# EAGLE board spi_tiny_usb (EAGLE 6.1)
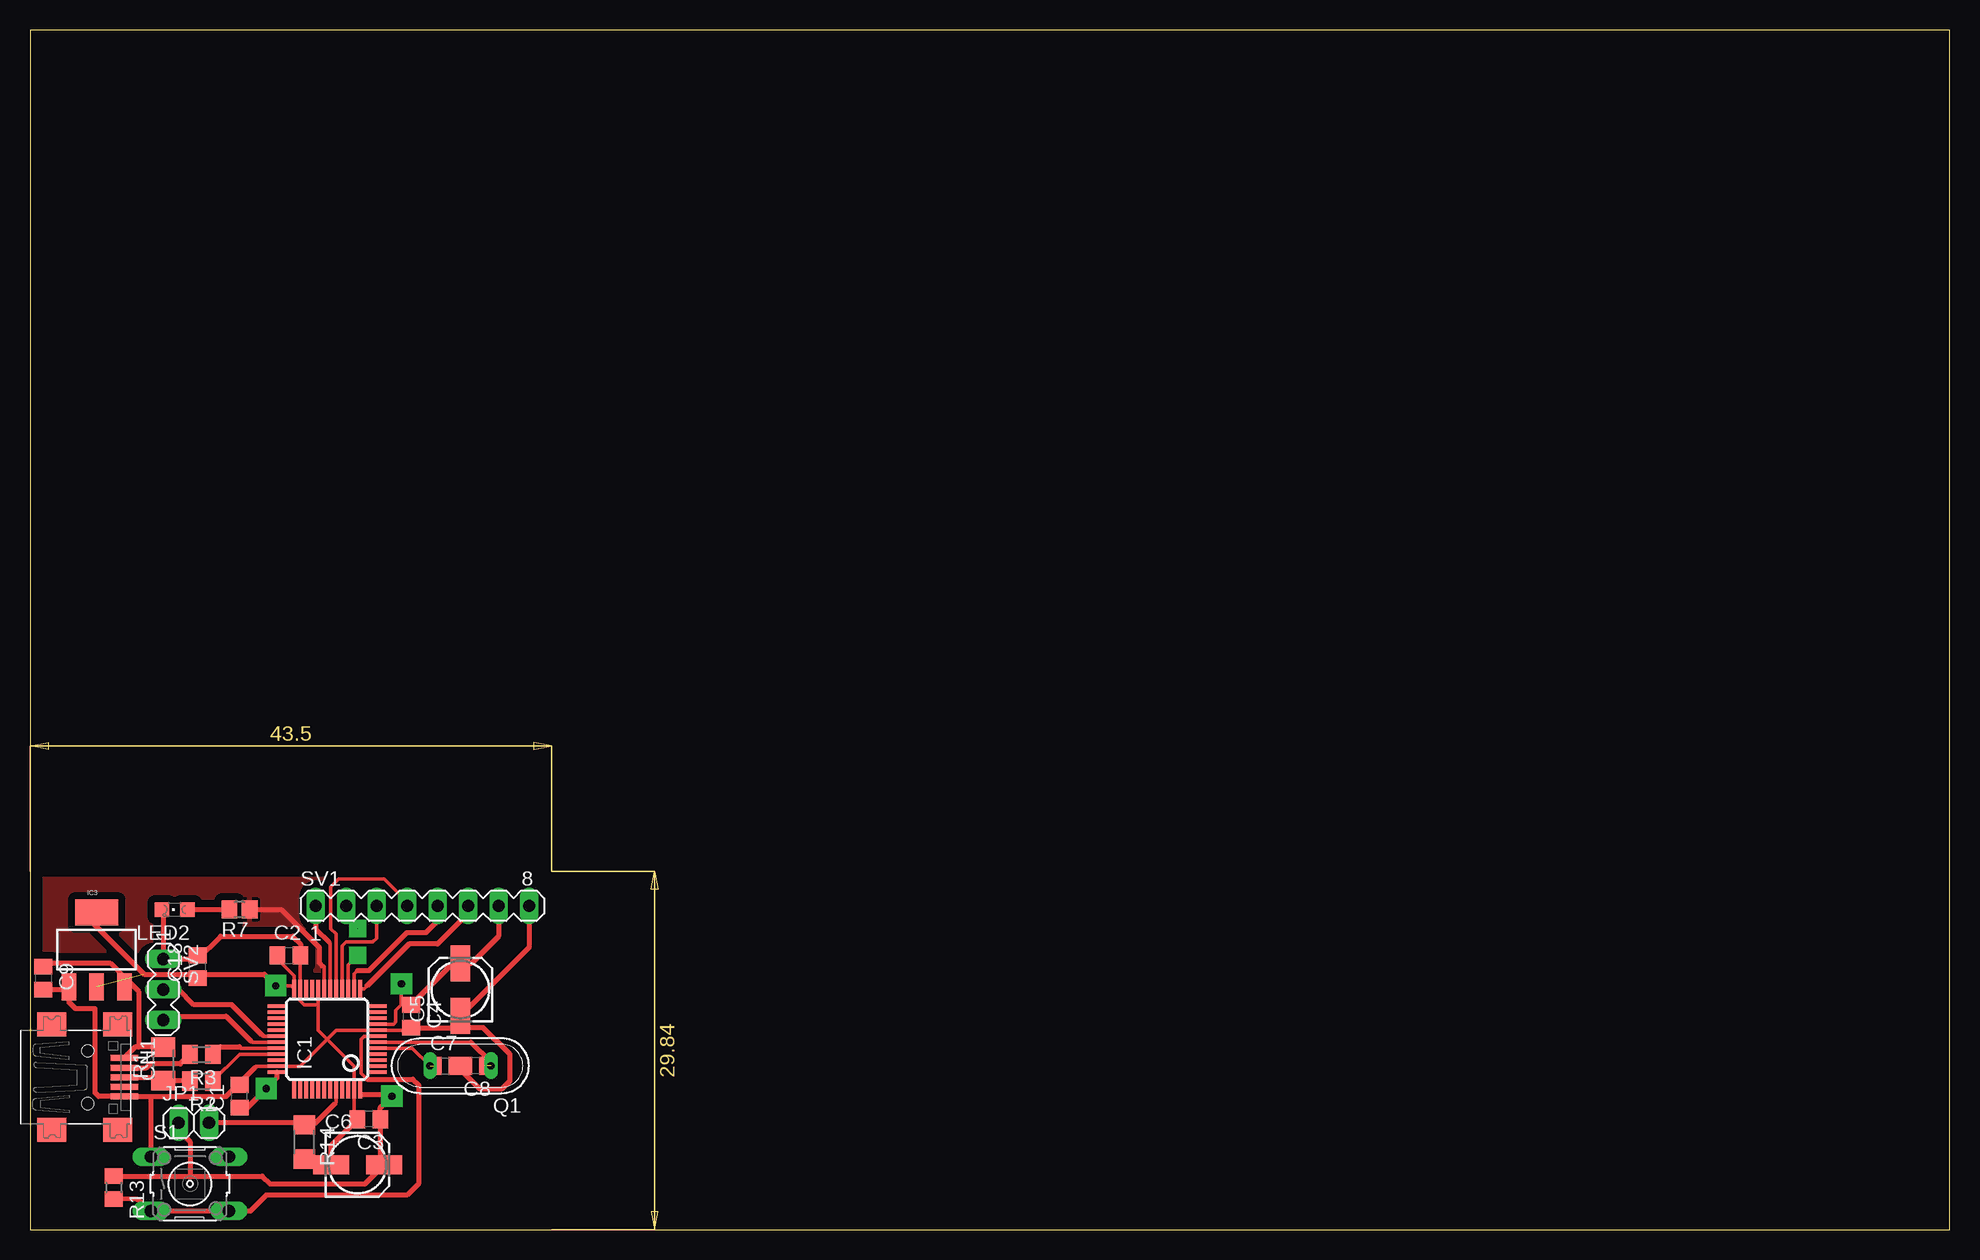
[diagram p0: board, top side]
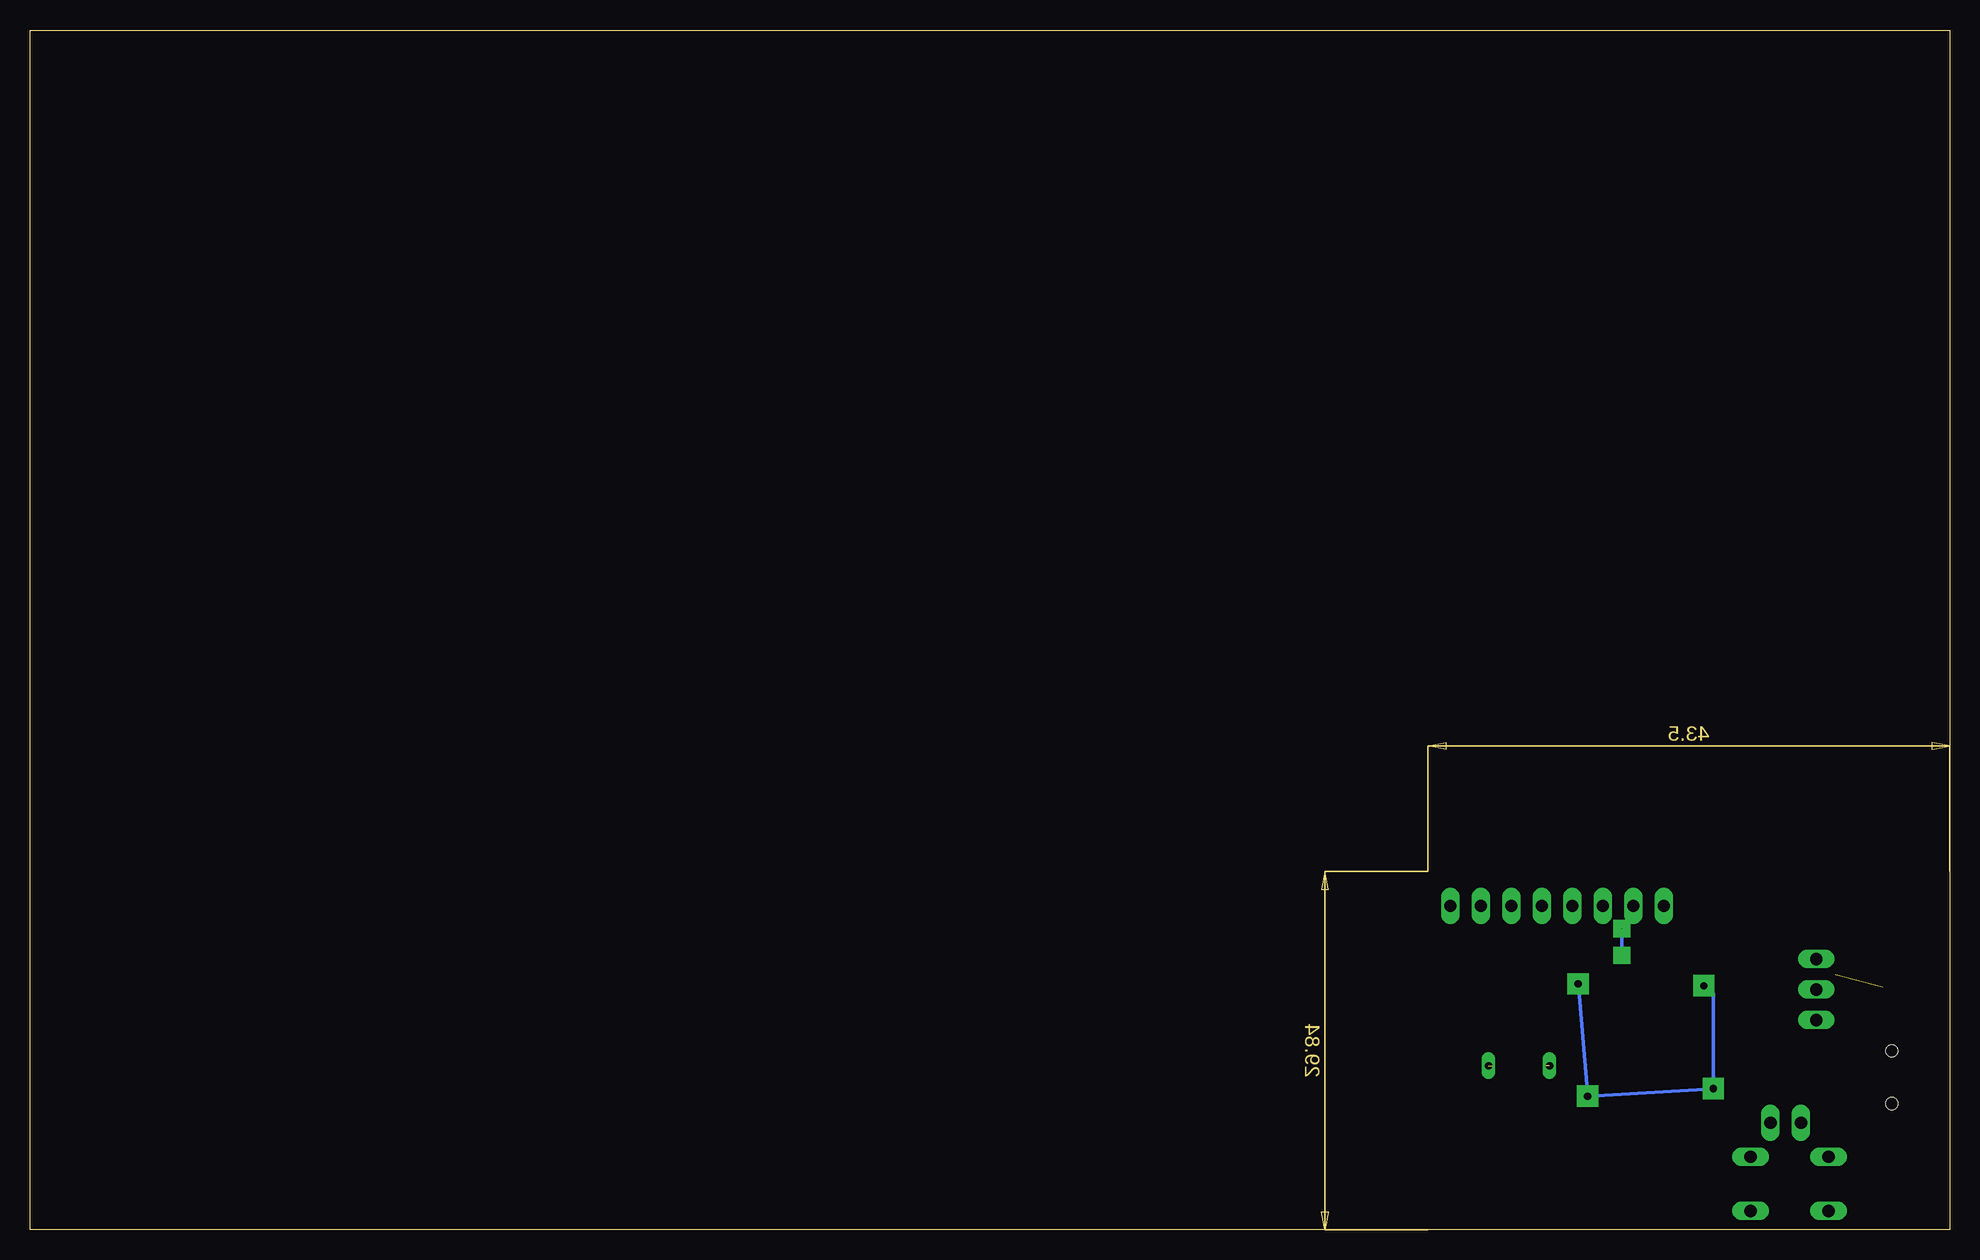
[diagram p1: board, bottom side, seen from below]

Size 160 x 100 mm. Coordinates in mm from the lower left corner, seen from the top.
Outline: 0,0 160,0 160,100 0,100 0,0
Copper layers (1*16): Top 0.035mm / dielectric 1.5mm / Bottom 0.035mm
Design rules: minimum track width 10mil, minimum drill 24mil, track to track 8mil, track to pad 8mil, pad to pad 8mil, via to via 8mil, smd to smd 8mil, copper to edge 40mil, drill to drill 8mil, minimum pad ring 10mil, minimum via ring 8mil, stop-mask expansion 4mil, vias tented up to drill 0mil, thermal gap 10mil

## Footprints (pad centres in the part's own frame; a part is rotated, then mirrored left to right if it is on the bottom)
C0805 = smd 1.3 x 1.5: 1 -0.95,0; 2 0.95,0
153CLV-0505 = smd 3 x 1.6: + 2.2,0; - -2.2,0
USB-MINIB = smd 0.5 x 2.308: D+ 0,4.064; D- -0.8,4.064; GND 1.6,4.064; ID 0.8,4.064; VBUS -1.6,4.064 | smd 2 x 2.4: GND1 -4.4,-2; GND2 -4.4,3.5; GND3 4.4,3.5; GND4 4.4,-2 | hole 1: -2.2,1; 2.2,1
TQFP48 = smd 0.305 x 1.524: 1 -2.75,-4.183; 2 -2.25,-4.183; 3 -1.75,-4.183; 4 -1.25,-4.183; 5 -0.75,-4.183; 6 -0.25,-4.183; 7 0.25,-4.183; 8 0.75,-4.183; 9 1.25,-4.183; 10 1.75,-4.183; 11 2.25,-4.183; 12 2.75,-4.183; 25 2.75,4.183; 26 2.25,4.183; 27 1.75,4.183; 28 1.25,4.183; 29 0.75,4.183; 30 0.25,4.183; 31 -0.25,4.183; 32 -0.75,4.183; 33 -1.25,4.183; 34 -1.75,4.183; 35 -2.25,4.183; 36 -2.75,4.183 | smd 1.524 x 0.305: 13 4.183,-2.75; 14 4.183,-2.25; 15 4.183,-1.75; 16 4.183,-1.25; 17 4.183,-0.75; 18 4.183,-0.25; 19 4.183,0.25; 20 4.183,0.75; 21 4.183,1.25; 22 4.183,1.75; 23 4.183,2.25; 24 4.183,2.75; 37 -4.183,2.75; 38 -4.183,2.25; 39 -4.183,1.75; 40 -4.183,1.25; 41 -4.183,0.75; 42 -4.183,0.25; 43 -4.183,-0.25; 44 -4.183,-0.75; 45 -4.183,-1.25; 46 -4.183,-1.75; 47 -4.183,-2.25; 48 -4.183,-2.75
SOT223 = smd 1.219 x 2.235: 1 -2.311,-3.099; 2 0,-3.099; 3 2.311,-3.099 | smd 3.6 x 2.2: 4 0,3.099
1X02 = drill 1.016 long: 1 -1.27,0; 2 1.27,0
CHIPLED_0805 = smd 1.2 x 1.2: A 0,-1.05; C 0,1.05
QS = drill 0.61 long: 1 -2.54,0; 2 2.54,0
M1206 = smd 1.6 x 2: 1 -1.4,0; 2 1.4,0
M0805 = smd 1.3 x 1.6: 1 -0.95,0; 2 0.95,0
R0805 = smd 1.3 x 1.5: 1 -0.85,0; 2 0.85,0
R0805' = smd 1.3 x 1.5: 1 -0.95,0; 2 0.95,0
R1206 = smd 1.6 x 1.803: 1 -1.422,0; 2 1.422,0
B3F-10XX = drill 1.016 long: 1 -3.251,2.261; 2 3.251,2.261; 3 -3.251,-2.261; 4 3.251,-2.261
MA08-1 = drill 1.016 long: 1 -8.89,0; 2 -6.35,0; 3 -3.81,0; 4 -1.27,0; 5 1.27,0; 6 3.81,0; 7 6.35,0; 8 8.89,0
MA03-1 = drill 1.016 long: 1 -2.54,0; 2 0,0; 3 2.54,0

## Placement (x,y rotation side)
C1  100n  [C0805]  17.46,11.11 90 top
C2  100n  [C0805]  21.59,22.86 0 top
C3  100n  [C0805]  28.26,9.21 180 top
C4  10n  [C0805]  31.75,17.78 270 top
C5  1u  [153CLV-0505]  35.88,20 90 top
C6  4.7u  [153CLV-0505]  27.3,5.4 0 top
C7  22p  [C0805]  34.61,13.65 0 top
C8  22p  [C0805]  37.15,13.65 180 top
C9  100n  [C0805]  1.11,20.95 270 top
C18  100n  [C0805]  13.97,21.91 90 top
CN1  [USB-MINIB]  3.81,12.7 270 top
IC1  STM32F10XCXT6  [TQFP48]  24.77,15.88 90 top
IC3  [SOT223]  5.56,23.34 0 top
JP1  [1X02]  13.65,8.89 0 top
LED2  GREEN  [CHIPLED_0805]  12.06,26.67 90 top
Q1  [QS]  35.88,13.65 180 top
R1  1k5  [M1206]  11.11,13.81 90 top
R2  68  [M0805]  14.29,12.38 180 top
R3  68  [M0805]  14.29,14.61 180 top
R7  250  [R0805]  17.46,26.67 180 top
R13  4k7  [R0805']  6.99,3.49 270 top
R14  4k7  [R1206]  22.86,7.3 270 top
S1  [B3F-10XX]  13.34,3.81 0 top
SV1  [MA08-1]  32.7,26.99 0 top
SV2  [MA03-1]  11.11,20 270 top

## Library data of the parts
C1-C9 C18 R1-R3 R13 R14 = rcl-kd
CN1 = adafruit
IC1 = stm32
IC3 = SparkFun
JP1 = pinhead-kd
LED2 = led
Q1 = special
R7 = resistor
S1 = switch-omron; MPN: B3F-1000; OC_FARNELL: 176432; OC_NEWARK: 36M3542
SV1 SV2 = con-lstb; OC_FARNELL: unknown; OC_NEWARK: unknown

## Nets
BUZZER: IC1.2
CE: IC1.14 SV1.5
D+: IC1.33 R2.1
D-: IC1.32 R3.1
EXT1: IC1.3
EXT2: IC1.4
GND: C1.2 C2.2 C3.2 C4.2 C5.- C6.- C7.2 C8.2 C9.2 C18.2 CN1.GND IC1.8 IC1.20 IC1.23 IC1.35 IC1.47 IC3.1 LED2.C R14.2 S1.1 SV1.8 SV2.1
GP: IC1.13 SV1.6
IRQ: IC1.18 SV1.1
LED: IC1.19 R7.1
MISO: IC1.16 SV1.3
MOSI: IC1.17 SV1.4
N$1: C7.1 IC1.5 Q1.2
N$2: C8.1 IC1.6 Q1.1
N$3: CN1.D+ R1.1 R2.2
N$4: CN1.D- R3.2
N$11: LED2.A R7.2
N$15: IC1.44 JP1.2 R14.1
RST: IC1.7 R13.2 S1.3
RX: IC1.31 SV2.3
SCK: IC1.15 SV1.2
SCL: IC1.42
SDA: IC1.43
TX: IC1.30 SV2.2
VBAT: IC1.1
VCC: C1.1 C2.1 C3.1 C4.1 C5.+ C6.+ C18.1 IC1.9 IC1.24 IC1.36 IC1.48 IC3.2 IC3.4 JP1.1 R13.1 SV1.7
VCC_IN: C9.1 CN1.VBUS IC3.3 R1.2

## Tracks (layer width: path | path; a pad name or v marks a point on that pad's centre or on a via)
CE
  Top 0.305: IC1.14 27.02,21.3 27.3,21.59
  Top 0.406: 27.3,21.59 28.26,21.59 31.43,24.77 33.02,24.77 33.97,25.72 SV1.5
D+
  Top 0.305: IC1.33 17.48,14.62 R2.1
D-
  Top 0.305: IC1.32 17.58,15.12 17.46,15.24
  Top 0.406: R3.1 15.88,15.24 17.46,15.24
GND
  Top 0.305: C3.2 27.02,9.5 IC1.47 27.02,13.62 24.77,15.88 | 24.77,15.88 25.52,16.62 IC1.8 31.55,16.62 C4.2 | 24.77,15.88 22.52,13.62 IC1.35 18.86,13.62 18.73,13.49 | IC1.20 24.02,18.73 | 24.02,18.73 24.02,16.62 24.77,15.88 | 24.02,18.73 22.86,18.73 22.52,19.08 IC1.23 22.52,22.84 C2.2 | C7.2 C8.2
  Top 0.406: C4.2 35.86,16.83 C5.- | SV1.8 41.59,23.52 C5.- | C7.2 37.47,11.75 39.37,11.75 40.01,12.38 40.01,14.61 37.78,16.83 36.2,16.83 35.88,17.14 C5.- | C3.2 25.11,7 C6.- 24.62,5.88 R14.2 | 17.38,12.14 16.34,11.1 10.16,11.1 | 17.38,12.14 18.73,13.49 | 10.16,11.1 CN1.GND 5.73,11.1 5.4,11.43 5.4,18.41 3.81,18.41 3.25,18.98 3.25,20 | IC3.1 3.25,20 | C9.2 3.24,20 3.25,20 | 13.97,22.54 SV2.1 11.11,26.67 LED2.C | 13.97,22.54 14.29,22.54 C18.2 | 13.97,22.54 15.88,24.45 21.91,24.45 22.54,23.81 C2.2 | S1.1 10.08,11.02 10.16,11.1 | C1.2 17.38,12.06 17.38,12.14
GP
  Top 0.305: IC1.13 27.84,20.06 28.1,20.32
  Top 0.406: SV1.6 36.51,26.35 33.97,23.81 31.59,23.81 28.1,20.32
IRQ
  Top 0.305: IC1.18 25.02,23.88 24.92,23.97
  Top 0.406: SV1.1 23.81,25.08 24.92,23.97
LED
  Top 0.305: IC1.19 24.52,21.84 24.45,21.91
  Top 0.406: 24.45,21.91 24.13,22.23 24.13,23.5 21.91,25.72 21.59,26.04 20.95,26.67 R7.1
  pour Top (isolate 0.61): 0,29.21 42.86,29.21 42.86,0 0,0
MISO
  Top 0.305: IC1.16 26.02,23.63 26.35,23.97 28.57,23.97 28.89,24.29 SV1.3
MOSI
  Top 0.305: IC1.17 25.52,24.65 25.08,25.08 25.08,28.57 25.72,29.21 29.53,29.21 31.43,27.3 SV1.4
N$1  (1 unrouted)
  Top 0.305: IC1.5 31.86,15.12 Q1.2
N$2  (1 unrouted)
  Top 0.305: IC1.6 36.76,15.62 | Q1.1 38.42,13.97
  Top 0.406: 36.76,15.62 38.42,13.97
N$3
  Top 0.406: R2.2 11.14,12.38 R1.1 10.82,12.7 CN1.D+
N$4
  Top 0.406: CN1.D- 9.69,13.5 10,13.81 12.54,13.81 R3.2
N$6
  cutout Top: 0,18.1 8.57,18.1 8.57,7.3 0,7.3
N$7
  cutout Top: 21.59,19.37 27.94,19.37 27.94,12.7 21.59,12.7
N$11
  Top 0.406: LED2.A R7.2
N$15
  Top 0.305: IC1.44 25.52,10.59 25.4,10.48
  Top 0.406: 25.4,10.48 23.81,8.89 23.18,8.89 | 23.18,8.89 JP1.2 | R14.1 23.01,8.72 23.18,8.89
RST
  Top 0.305: IC1.7 27.87,16.12 27.62,15.88 27.62,13.02 28.1,12.54
  Top 0.406: 28.1,12.54 31.91,12.54 32.38,12.06 32.38,3.81 31.43,2.86 19.68,2.86 18.38,1.55 S1.3 8.93,2.5 R13.2
RX
  Top 0.305: IC1.31 18.51,15.62 18.41,15.72
  Top 0.406: 18.41,15.72 16.35,17.78 11.43,17.78 SV2.3
SCK  (via drill 0 pad 1.42)
  Top 0.305: SV1.2 26.35,26.04 v27.3,25.08 | IC1.15 26.52,22.07 v27.3,22.86
  Bottom 0.305: v27.3,25.08 v27.3,22.86
TX
  Top 0.305: IC1.30 19.43,16.12 19.37,16.19
  Top 0.406: 19.37,16.19 16.83,18.73 13.65,18.73 12.38,20 SV2.2
VCC  (via drill 0.6 pad 1.78)  (1 unrouted)
  Top 0.305: IC1.9 30.3,17.12 30.48,17.3 30.48,18.26 30.95,18.73 | IC1.48 27.52,11.22 27.55,11.22 27.59,11.27 | C3.1 29.21,9.53 | C2.1 20.96,22.22 22.02,21.16 IC1.24 21.75,20.32 v20.48,20.32 | C4.1 30.95,18.73 | v30.96,20.48 30.95,18.73
  Top 0.406: C4.1 35.22,22.2 C5.+ 36.81,22.2 39.05,24.45 SV1.7 | IC1.36 20.58,12.64 v19.68,11.75 18.1,10.16 C1.1 | 20.32,22.86 C2.1 | C3.1 29.21,5.7 C6.+ 27.92,3.81 20,3.81 19.37,4.44 13.34,4.44 | 27.59,11.27 30.01,11.27 v30.16,11.11 29.21,10.16 29.21,9.53 | IC3.4 5.24,25.56 9.53,21.27 14.29,21.27 | 14.29,21.27 19.53,21.27 v20.48,20.32 | R13.1 13.34,4.44 | C18.1 14.29,21.27 | JP1.1 12.38,8.26 13.34,7.3 13.34,4.44
  Bottom 0.305: v20.48,20.32 19.68,19.68 v19.68,11.75 v30.16,11.11 v30.96,20.48
VCC_IN
  Top 0.406: C9.1 1.27,21.91 1.59,22.23 6.67,22.23 7.94,20.95 7.94,20.62 IC3.3 8.34,20.55 9.05,19.84 9.05,15.21 | R1.2 9.05,15.21 | 9.05,15.21 8.79,15.21 CN1.VBUS